# Altium PCB PCB1.PcbDoc
Units mm, origin at the board's own origin, x right, y up, seen from the top; angles counter-clockwise.
Board outline 80 x 55 mm, 2 copper layers (Top Layer, Bottom Layer); 38 components, 46 nets, 169 pads, 113 vias.
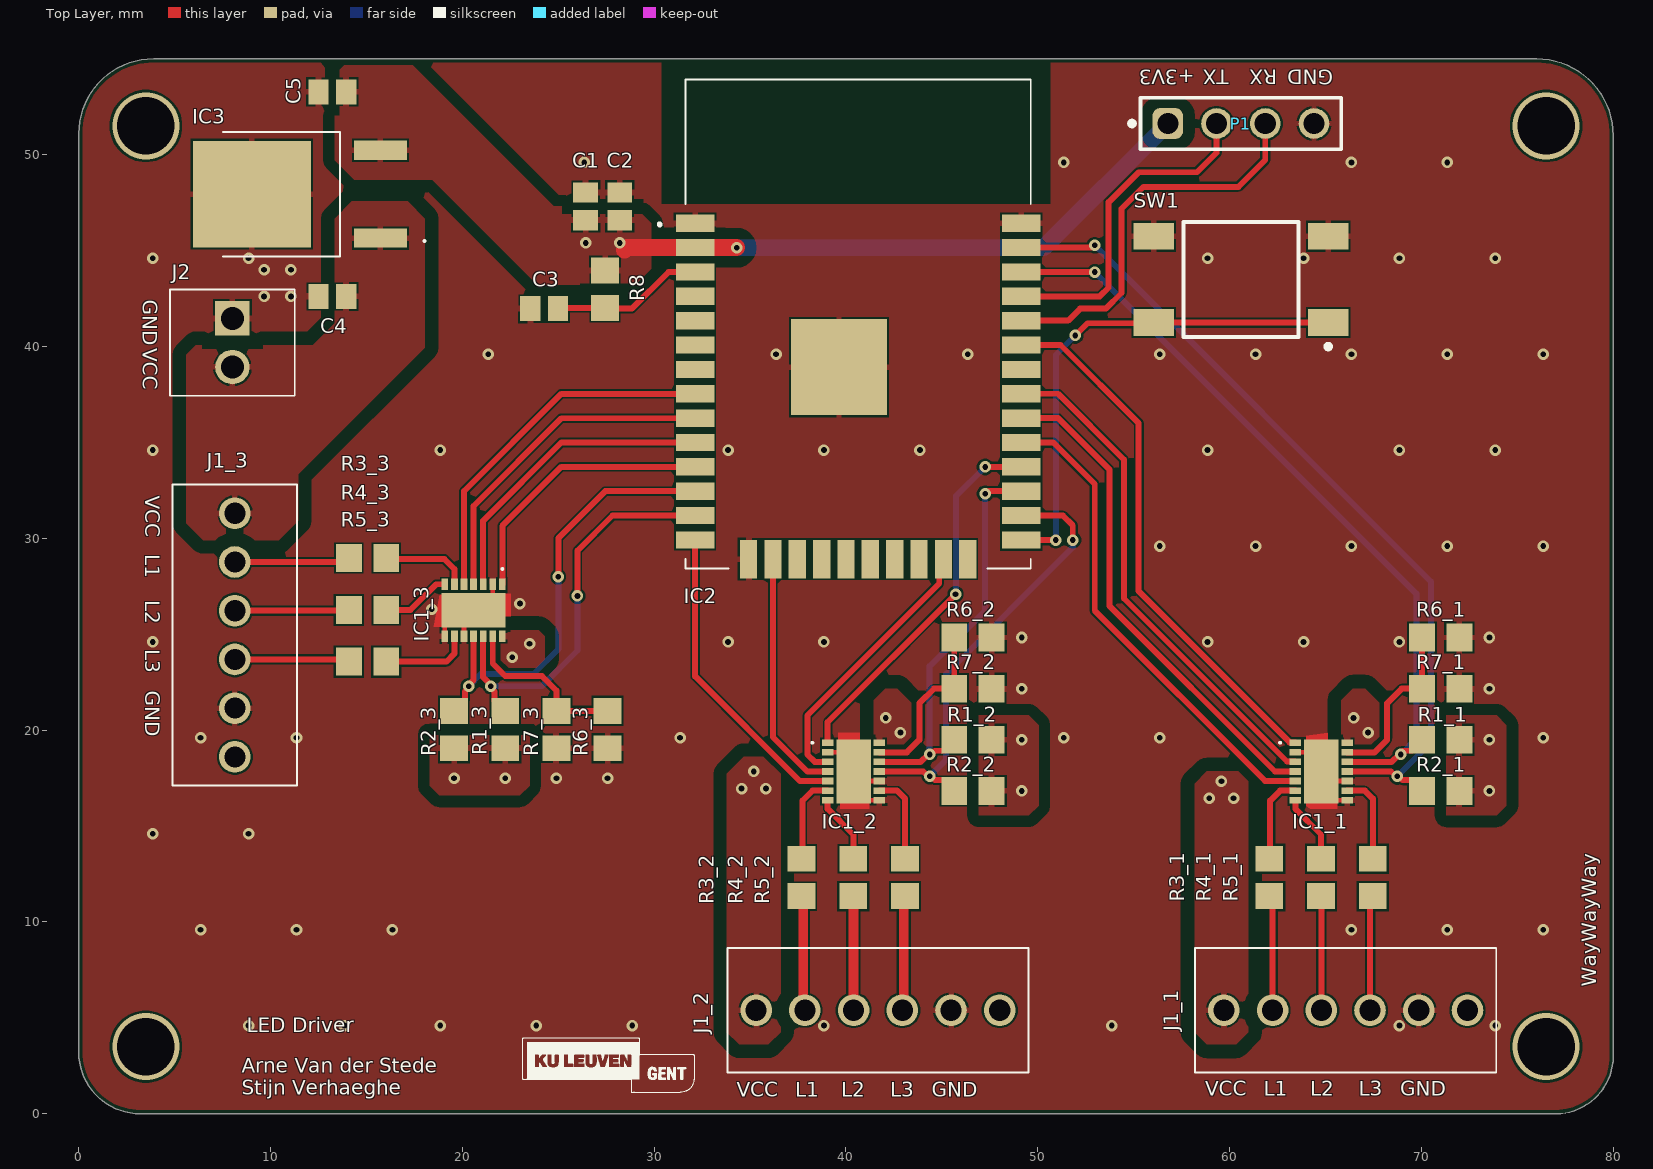
[diagram p0: Top Layer view]
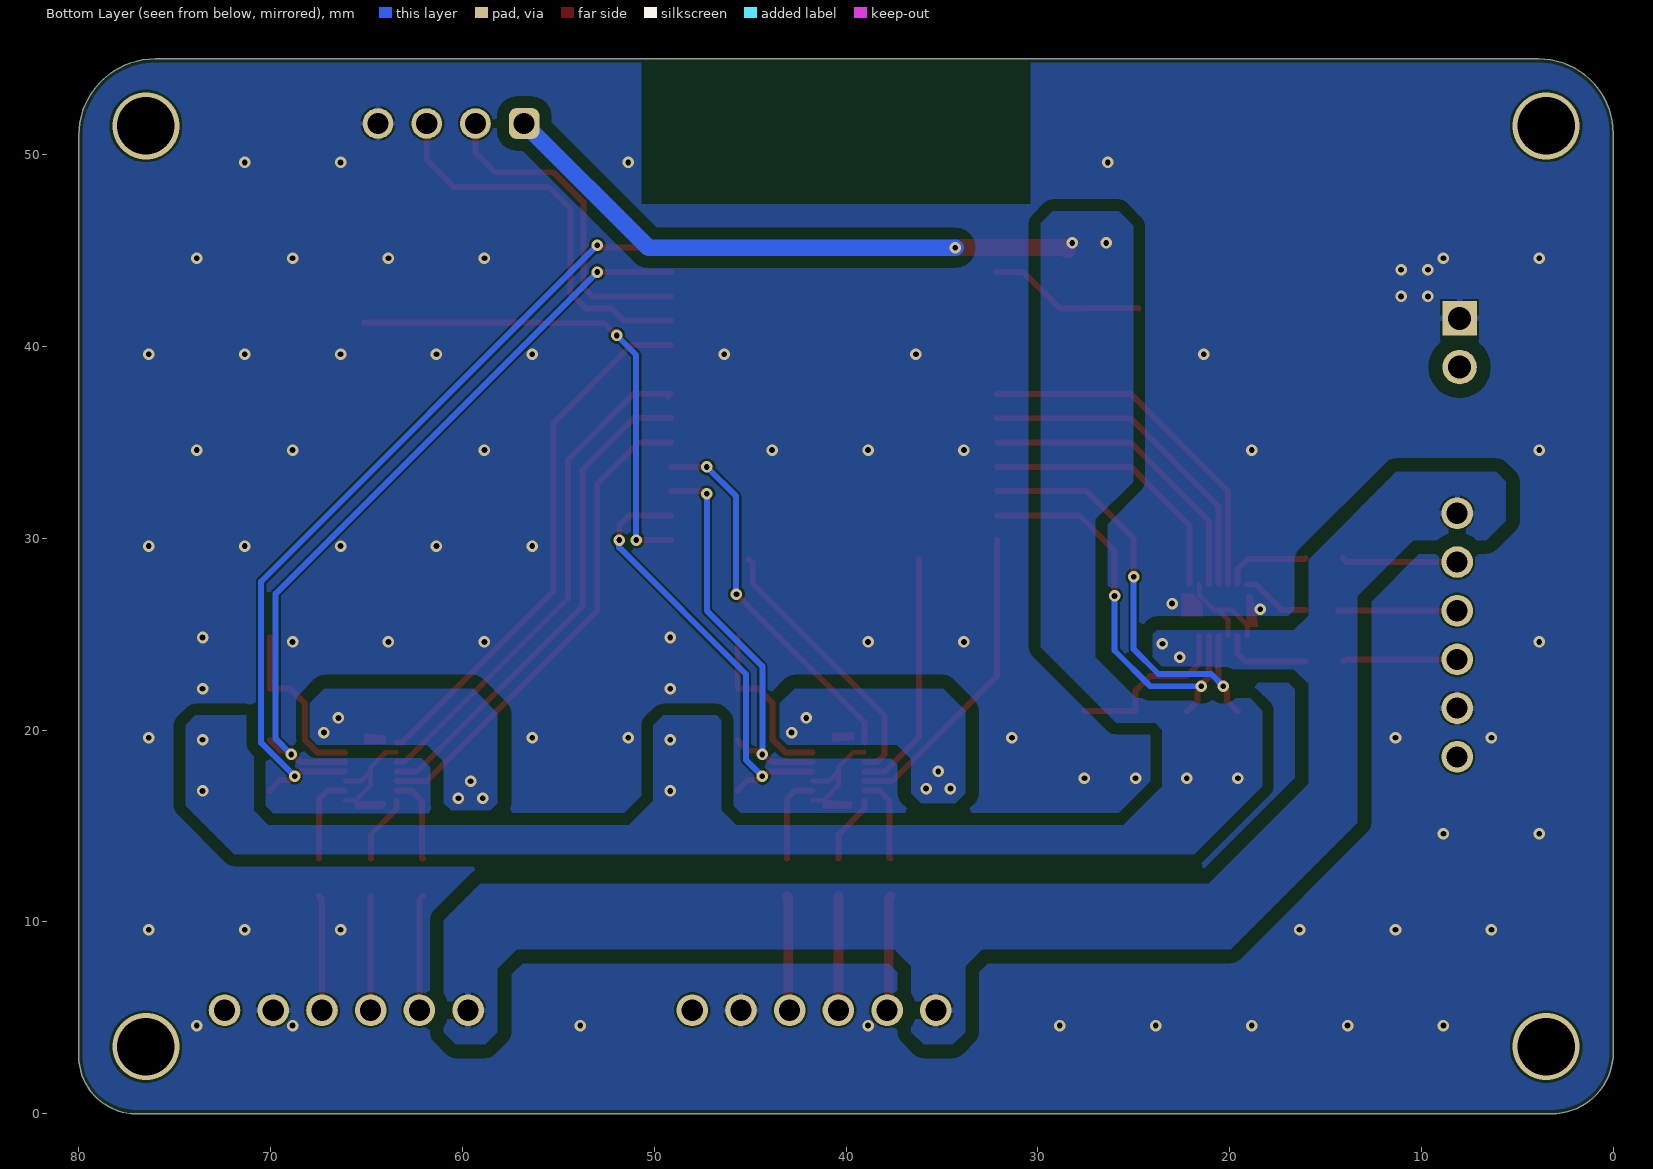
[diagram p1: Bottom Layer view, seen from below]
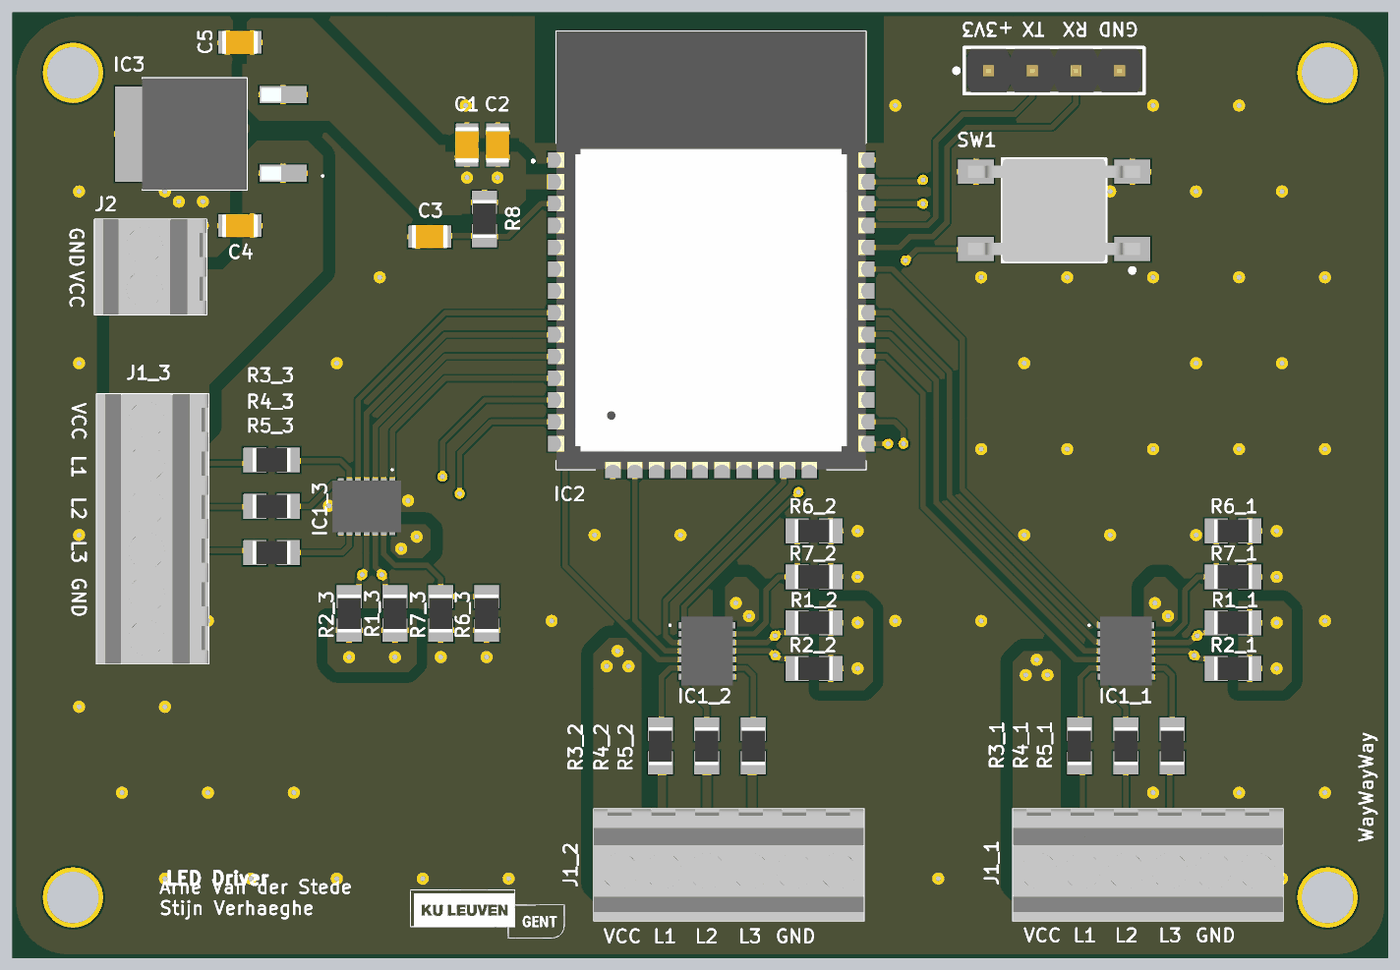
[diagram p2: 3D render of the assembled board from above, using the file's embedded part models]

## Layer stack, top to bottom
Top Solder: solder mask 0.0102, Solder Resist, Dk 3.5
Top Layer: signal copper 0.0356
Dielectric 1: dielectric 0.32, FR-4, Dk 4.8
Bottom Layer: signal copper 0.0356
Bottom Solder: solder mask 0.0102, Solder Resist, Dk 3.5

## Board outline
3.2,0 77,0 ccw(c77,3) 80,3 80,51 ccw(c76,51) 76,55 3.9,55 ccw(c3.9,51.1) 0,51.1 0,3.2 ccw(c3.2,3.2)

## Design rules (kind name [scope] priority, off if disabled: settings)
BoardOutlineClearance [All] p1: gap=0.2 ignorepadtopadclearanceinfootprint=FALSE
Clearance Clearance_2 [InNet('+3V3')] p1: gap=0.6 ignorepadtopadclearanceinfootprint=TRUE except(0.102: Arc-Arc Arc-Track Arc-SMDPad Arc-THPad Arc-Text Track-Track Track-SMDPad Track-THPad Track-Text SMDPad-SMDPad SMDPad-THPad SMDPad-Text THPad-THPad THPad-Text Fill-Text Poly-Text Region-Text Text-Text; 0.127: Arc-Via Track-Via SMDPad-Via THPad-Via Via-Via Via-Text; 0.254: Arc-Hole Track-Hole SMDPad-Hole THPad-Hole Via-Hole Fill-Hole Poly-Hole Region-Hole Text-Hole)
Clearance [InNet('VCC')] p2: gap=0.254 ignorepadtopadclearanceinfootprint=TRUE except(0.102: Arc-SMDPad Arc-THPad Arc-Text Track-SMDPad Track-THPad Track-Text SMDPad-SMDPad SMDPad-THPad SMDPad-Text THPad-THPad THPad-Text Fill-Text Poly-Text Region-Text Text-Text; 0.127: Arc-Via Track-Via SMDPad-Via THPad-Via Via-Via Via-Text; 0.71: Arc-Arc Arc-Track Track-Track THPad-Fill THPad-Poly THPad-Region Via-Fill Via-Poly Via-Region Fill-Fill Fill-Poly Fill-Region Poly-Poly Poly-Region Region-Region)
Clearance Clearance_1 [All] p3: gap=0.102 ignorepadtopadclearanceinfootprint=TRUE except(0.127: Arc-Via Track-Via SMDPad-Via THPad-Via Via-Via Via-Fill Via-Poly Via-Region Via-Text; 0.254: Arc-Hole Track-Hole SMDPad-Hole THPad-Hole Via-Hole Fill-Hole Poly-Hole Region-Hole Text-Hole)
ComponentClearance [All] p1: gap=0.102 collisioncheckmode=3 verticalgap=0.102 showdistances=TRUE
DiffPairsRouting [All] p1: maxlimit=0.102 minlimit=0.102 mostfreqgap=0.102 toplayer_minwidth=0.102 toplayer_maxwidth=1816.048 toplayer_prefwidth=0.102 bottomlayer_minwidth=0.102 bottomlayer_maxwidth=1816.048 bottomlayer_prefwidth=0.102 maxuncoupledlength=12.7
Height [All] p1: minheight=0 maxheight=1816.048 prefheight=12.7
HoleSize [All] p1: absolutevalues=TRUE maxlimit=6.3 minlimit=0.2 maxpercent=80.000 minpercent=20.000
HoleToHoleClearance [All] p1: gap=0.254 allowstackedmicrovias=FALSE
MinimumAnnularRing [All] p1: minimumring=0.152
MinimumSolderMaskSliver [All] p1: minsoldermaskwidth=0.152
PlaneClearance [All] p1: clearance=0.102
PlaneConnect PlaneConnectPowerPads [InPadClass('PowerPads')] p1: planeconnectstyle=Direct reliefexpansion=0.508 reliefentries=4 reliefconductorwidth=0.254 reliefairgap=0.254
PlaneConnect [All] p2: pad.planeconnectstyle=Relief pad.reliefexpansion=0.3 pad.reliefentries=4 pad.reliefconductorwidth=0.102 pad.reliefairgap=0.102 via.planeconnectstyle=Direct via.reliefexpansion=0.3 via.reliefentries=4 via.reliefconductorwidth=0.127 via.reliefairgap=0.127
PolygonConnect PolygonConnectPowerPads [All vs (InPadClass('PowerPads'))] p1: connectstyle=Direct reliefconductorwidth=0.254 reliefentries=4 polygonreliefangle="90 Angle" airgapwidth=0.254
PolygonConnect [All] p2: thpad.connectstyle=Relief thpad.reliefconductorwidth=0.31 thpad.reliefentries=4 thpad.polygonreliefangle="90 Angle" thpad.airgapwidth=0.102 smdpad.connectstyle=Relief smdpad.reliefconductorwidth=0.31 smdpad.reliefentries=4 smdpad.polygonreliefangle="90 Angle" smdpad.airgapwidth=0.102 via.connectstyle=Direct via.reliefconductorwidth=0.31 via.reliefentries=4 via.polygonreliefangle="90 Angle" via.airgapwidth=0.102
RoutingVias [All] p1: holewidth=0.2 width=0.45 viastyle="Through Hole" minholewidth=0.2 minwidth=0.45 maxholewidth=6.3 maxwidth=6.55
SilkToSilkClearance [All] p1: silktosilkclearance=0.127
SilkToSolderMaskClearance [IsPad] p1: minsilkscreentomaskgap=0.127 clearancetoexposedcopper=TRUE
SolderMaskExpansion [All] p1: expansion=0.051 istentingtop=FALSE
SupplyNets "Schematic Supply Nets_2" [InNet('GND')] p1: voltage=0.000
SupplyNets "Schematic Supply Nets_1" [InNet('VCC')] p2: voltage=0.000
SupplyNets "Schematic Supply Nets" [InNet('+3V3')] p3: voltage=0.000
UnRoutedNet [All] p1: checkbadconnections=TRUE
Width Power_20mil [All] p1: maxlimit=25.4 minlimit=0.254 preferedwidth=0.508 minimp=50.000000 maximp=50.000000 favimp=50.000000
Width Power_12mil [All] p2: maxlimit=25.4 minlimit=0.305 preferedwidth=0.305 minimp=50.000000 maximp=50.000000 favimp=50.000000
Width Width_10mil [All] p3: maxlimit=25.4 minlimit=0.254 preferedwidth=0.254 minimp=50.000000 maximp=50.000000 favimp=50.000000
Width Width_6mil [All] p4: maxlimit=25.4 minlimit=0.152 preferedwidth=0.152 minimp=50.000000 maximp=50.000000 favimp=50.000000
Width Width_4mil [All] p5: maxlimit=25.4 minlimit=0.102 preferedwidth=0.102 minimp=50.000000 maximp=50.000000 favimp=50.000000
19 further rules are at their usual default settings.

## Classes and differential pairs
channel class Driver: Driver1 Driver2 Driver3
component class MCU: C1 C2 C3 C4 C5 IC2 IC3 J2 P1 R8 SW1
component class Driver3: IC1_3 J1_3 R1_3 R2_3 R3_3 R4_3 R5_3 R6_3 R7_3
component class Driver2: IC1_2 J1_2 R1_2 R2_2 R3_2 R4_2 R5_2 R6_2 R7_2
component class Driver1: IC1_1 J1_1 R1_1 R2_1 R3_1 R4_1 R5_1 R6_1 R7_1

## Components (designator, comment, footprint, x,y, rotation, side; value= is the part's Value field where it differs from the comment)
C1 "Capacitor 10 µF +/-10% 50 V 0805" CAPC2013X95X50LL10T25 26.426,47.31 r90 top value=10uF
C2 "Capacitor 0.1 µF +/-10% 50 V 0805" CAPC2013X95X50LL10T25 28.204,47.31 r90 top value=0.1uF
C3 "Capacitor 100 nF +/-10% 50 V 0805" CAPC2013X95X50LL10T25 24.267,41.976 r180 top value=1uF
C4 "Capacitor 100 nF +/-10% 50 V 0805" CAPC2013X95X50LL10T25 13.218,42.611 r0 top value=0.33uF
C5 "Capacitor 100 nF +/-10% 50 V 0805" CAPC2013X95X50LL10T25 13.218,53.279 r180 top value=0.1uF
IC1_1 "AL1793AFE-13" AL1793AFE13 64.78,17.846 r270 top (schematic designator IC1)
IC1_2 "AL1793AFE-13" AL1793AFE13 40.396,17.846 r270 top (schematic designator IC1)
IC1_3 "AL1793AFE-13" AL1793AFE13 20.584,26.256 r180 top (schematic designator IC1)
IC2 "ESP-WROOM-32D" ESPWROOM32D 40.634,41.168 r0 top
IC3 "UA78M33IKVURG3" UA78M33IKVURG3 15.727,47.945 r180 top
J1_1 "282834-6" 2828346 59.7,5.4 r0 top (schematic designator J1)
J1_2 "282834-6" 2828346 35.316,5.4 r0 top (schematic designator J1)
J1_3 "282834-6" 2828346 8.138,31.308 r270 top (schematic designator J1)
J2 "282834-2" 282834-2_1 8.011,41.473 r270 top
P1 "61300411121" 61300411121 60.589,51.628 r0 top
R1_1 "Resistor 1k +/-1% 0805 125 mW" RESC2013X70X40ML20T20 71.003,19.497 r0 top value=1k (schematic designator R1)
R1_2 "Resistor 1k +/-1% 0805 125 mW" RESC2013X70X40ML20T20 46.619,19.497 r0 top value=1k (schematic designator R1)
R1_3 "Resistor 1k +/-1% 0805 125 mW" RESC2013X70X40ML20T20 22.235,20.033 r270 top value=1k (schematic designator R1)
R2_1 "Resistor 1k +/-1% 0805 125 mW" RESC2013X70X40ML20T20 71.003,16.83 r0 top value=10k (schematic designator R2)
R2_2 "Resistor 1k +/-1% 0805 125 mW" RESC2013X70X40ML20T20 46.619,16.83 r0 top value=10k (schematic designator R2)
R2_3 "Resistor 1k +/-1% 0805 125 mW" RESC2013X70X40ML20T20 19.568,20.033 r270 top value=10k (schematic designator R2)
R3_1 "Resistor 1k +/-1% 0805 125 mW" RESC2013X70X40ML20T20 62.064,12.32 r270 top value=0 (schematic designator R3)
R3_2 "Resistor 1k +/-1% 0805 125 mW" RESC2013X70X40ML20T20 37.68,12.32 r270 top value=0 (schematic designator R3)
R3_3 "Resistor 1k +/-1% 0805 125 mW" RESC2013X70X40ML20T20 15.058,28.972 r180 top value=0 (schematic designator R3)
R4_1 "Resistor 1k +/-1% 0805 125 mW" RESC2013X70X40ML20T20 64.764,12.32 r270 top value=0 (schematic designator R4)
R4_2 "Resistor 1k +/-1% 0805 125 mW" RESC2013X70X40ML20T20 40.38,12.32 r270 top value=0 (schematic designator R4)
R4_3 "Resistor 1k +/-1% 0805 125 mW" RESC2013X70X40ML20T20 15.058,26.272 r180 top value=0 (schematic designator R4)
R5_1 "Resistor 1k +/-1% 0805 125 mW" RESC2013X70X40ML20T20 67.464,12.32 r270 top value=0 (schematic designator R5)
R5_2 "Resistor 1k +/-1% 0805 125 mW" RESC2013X70X40ML20T20 43.08,12.32 r270 top value=0 (schematic designator R5)
R5_3 "Resistor 1k +/-1% 0805 125 mW" RESC2013X70X40ML20T20 15.058,23.572 r180 top value=0 (schematic designator R5)
R6_1 "Resistor 1k +/-1% 0805 125 mW" RESC2013X70X40ML20T20 71.003,24.831 r0 top value=22k (schematic designator R6)
R6_2 "Resistor 1k +/-1% 0805 125 mW" RESC2013X70X40ML20T20 46.619,24.831 r0 top value=22k (schematic designator R6)
R6_3 "Resistor 1k +/-1% 0805 125 mW" RESC2013X70X40ML20T20 27.569,20.033 r270 top value=22k (schematic designator R6)
R7_1 "Resistor 1k +/-1% 0805 125 mW" RESC2013X70X40ML20T20 71.003,22.164 r0 top value=1M (schematic designator R7)
R7_2 "Resistor 1k +/-1% 0805 125 mW" RESC2013X70X40ML20T20 46.619,22.164 r0 top value=1M (schematic designator R7)
R7_3 "Resistor 1k +/-1% 0805 125 mW" RESC2013X70X40ML20T20 24.902,20.033 r270 top value=1M (schematic designator R7)
R8 "Resistor 1k +/-1% 0805 125 mW" RESC2013X70X40ML20T20 27.442,42.992 r90 top value=10k
SW1 "FSM4JSMATR" TECO-FSM4JSMATR_V 60.589,43.5 r270 top

## Footprints (in the part's own frame and the unit in brackets; to place one, negate y for a bottom-side part, rotate by r counter-clockwise, add the part's x,y. Pads: shape width x height; smd on the part's side, far side on the other; paste and mask are expansions set on the pad)
282834-2_1 [mm]
  rect 1.8x1.8 hole 1.2: 1(0,0)
  round 1.8 hole 1.2: 2(2.54,0)
  silkscreen extent -1.5,-3.25 4.04,3.25, body extent -1.5,-3.25 4.04,3.25, height 9.87
2828346 [mm]
  round 1.65 hole 1.1: 1(0,0) 2(2.54,0) 3(5.08,0) 4(7.62,0) 5(10.16,0) 6(12.7,0)
  silkscreen extent -1.5,-3.25 14.2,3.25, body extent -1.5,-3.25 14.2,3.25, height 9.75
61300411121 [mm] "Pin Header, pitch 2.54 mm, THT, Vertical, single row, 4p"
  rrect50% 1.6x1.6 hole 1.1: 1(-3.81,0)
  round 1.6 hole 1.1: 2(-1.27,0) 3(1.27,0) 4(3.81,0)
  silkscreen extent -5.8,-1.35 5.23,1.35, body extent -5.08,-1.27 5.08,1.27, height 8.57
AL1793AFE13 [mm]
  rect 0.35x0.6 smd: 1(-1.5,-1.35) 2(-1,-1.35) 3(-0.5,-1.35) 4(0,-1.35) 5(0.5,-1.35) 6(1,-1.35) 7(1.5,-1.35) 8(1.5,1.35) 9(1,1.35) 10(0.5,1.35) 11(0,1.35) 12(-0.5,1.35) 13(-1,1.35) 14(-1.5,1.35)
  rect 3.35x1.8 smd: 15(0,0)
  silkscreen extent -1.55,-2.2 -1.45,-2.1, body extent -2,-1.5 2,1.5, height 0.75
CAPC2013X95X50LL10T25 [mm] "Chip Capacitor, 2-Leads, Body 2.10x1.35mm, IPC High Density"
  rect 1.05x1.3 smd: 1(-0.725,0) 2(0.725,0)
  body extent -1.05,-0.67 1.05,0.67, height 0.95
ESPWROOM32D [mm]
  rect 2x0.9 smd: 1(-8.5,5.26) 2(-8.5,3.99) 3(-8.5,2.72) 4(-8.5,1.45) 5(-8.5,0.18) 6(-8.5,-1.09) 7(-8.5,-2.36) 8(-8.5,-3.63) 9(-8.5,-4.9) 10(-8.5,-6.17) 11(-8.5,-7.44) 12(-8.5,-8.71) 13(-8.5,-9.98) 14(-8.5,-11.25) 25(8.5,-11.25) 26(8.5,-9.98) 27(8.5,-8.71) 28(8.5,-7.44) 29(8.5,-6.17) 30(8.5,-4.9) 31(8.5,-3.63) 32(8.5,-2.36) 33(8.5,-1.09) 34(8.5,0.18) 35(8.5,1.45) 36(8.5,2.72) 37(8.5,3.99) 38(8.5,5.26)
  rect 0.9x2 smd: 15(-5.715,-12.25) 16(-4.445,-12.25) 17(-3.175,-12.25) 18(-1.905,-12.25) 19(-0.635,-12.25) 20(0.635,-12.25) 21(1.905,-12.25) 22(3.175,-12.25) 23(4.445,-12.25) 24(5.715,-12.25)
  rect 5x5 smd: 39(-1,-2.24)
  silkscreen extent -10.4,-12.75 9,12.75, body extent -9,-12.75 9,12.75, height 3.1
RESC2013X70X40ML20T20 [mm] "Chip Resistor, 2-Leads, Body 2.2x1.35mm, IPC Low Density"
  rect 1.35x1.45 smd: 1(-0.975,0) 2(0.975,0)
  body extent -1.1,-0.67 1.1,0.67, height 0.7
TECO-FSM4JSMATR_V [mm] "SMD, 4-Leads, Body 6x6mm, Pitch 4.5mm"
  rect 1.4x2.1 smd: 1(2.25,4.55) 2(2.25,-4.55) 3(-2.25,4.55) 4(-2.25,-4.55)
  silkscreen extent -3,-3 3.62,4.68, body extent -3,-5 3,5, height 5.08
UA78M33IKVURG3 [mm]
  rect 2.75x1 smd: 1(0,2.29) 3(0,-2.29)
  rect 6.15x5.55 smd: 4(6.7,0)
  silkscreen extent -2.35,-3.25 8.2,3.25, body extent 0.1,-3.25 8.2,3.25, height 2.62

## Part data
C1: library part CMP-001-00018-6, "Chip Capacitor, 10 µF, +/- 10%, 50 V, 0805 (2012 Metric)", Capacitor Type=Ceramic, Case/Package=0805, Max Operating Temperature=125°C, Min Operating Temperature=-55°C, Tolerance=10%, Voltage Rating=50V, Mounting Technology=SM, Pins=2, RoHS Compliant=True
C2 C5: library part CMP-001-00018-6, "Chip Capacitor, 100 nF, +/- 10%, 50 V, 0805 (2012 Metric)", Capacitor Type=Ceramic, Case/Package=0805, Max Operating Temperature=125°C, Min Operating Temperature=-55°C, Tolerance=10%, Voltage Rating=50V, Mounting Technology=SM, Pins=2, RoHS Compliant=True
C3: library part CMP-001-00018-6, "Chip Capacitor, 1 µF, +/- 10%, 50 V, 0805 (2012 Metric)", Capacitor Type=Ceramic, Case/Package=0805, Max Operating Temperature=125°C, Min Operating Temperature=-55°C, Tolerance=10%, Voltage Rating=50V, Mounting Technology=SM, Pins=2, RoHS Compliant=True
C4: library part CMP-001-00018-6, "Chip Capacitor, 0.33 µF, +/- 10%, 50 V, 0805 (2012 Metric)", Capacitor Type=Ceramic, Case/Package=0805, Max Operating Temperature=125°C, Min Operating Temperature=-55°C, Tolerance=10%, Voltage Rating=50V, Mounting Technology=SM, Pins=2, RoHS Compliant=True
IC1_1 IC1_2 IC1_3: "Integrated Circuit", Manufacturer_Name="Diodes Incorporated", Mouser Part Number=621-AL1793AFE-13, Arrow Part Number=AL1793AFE-13, Arrow Price/Stock=https://www.arrow.com/en/products/al1793afe-13/diodes-incorporated?region=nac, Datasheet Link=https://www.diodes.com//assets/Datasheets/AL1791_1792_1793_1794.pdf, Height=0.65mm, Manufacturer_Part_Number=AL1793AFE-13, Mouser Price/Stock=https://www.mouser.co.uk/ProductDetail/Diodes-Incorporated/AL1793AFE-13?qs=bKenfurwlskeSg5Tj2A9LQ%3D%3D
IC2: "Integrated Circuit", Manufacturer_Name="Espressif Systems", Mouser Part Number=356-ESP-WROOM-32D, Datasheet Link=https://componentsearchengine.com/Datasheets/1/ESP-WROOM-32D.pdf, Height=3.2mm, Manufacturer_Part_Number=ESP-WROOM-32D, Mouser Price/Stock=https://www.mouser.co.uk/ProductDetail/Espressif-Systems/ESP-WROOM-32D?qs=MLItCLRbWsyWVKgdQMcFuQ%3D%3D
IC3: "Integrated Circuit", Manufacturer_Name="Texas Instruments", Mouser Part Number=595-UA78M33IKVURG3, Arrow Part Number=UA78M33IKVURG3, Arrow Price/Stock=https://www.arrow.com/en/products/ua78m33ikvurg3/texas-instruments?region=nac, Datasheet Link=http://www.ti.com/lit/gpn/ua78m, Height=2.52mm, Manufacturer_Part_Number=UA78M33IKVURG3, Mouser Price/Stock=https://www.mouser.co.uk/ProductDetail/Texas-Instruments/UA78M33IKVURG3?qs=dP8SwFlKThxMmGpfgS%2FADQ%3D%3D
J1_1 J1_2 J1_3: "Connector", Manufacturer_Name="TE Connectivity", Mouser Part Number=571-282834-6, Arrow Part Number=282834-6, Arrow Price/Stock=https://www.arrow.com/en/products/282834-6/te-connectivity?utm_currency=USD&region=nac, Datasheet Link=https://www.te.com/commerce/DocumentDelivery/DDEController?Action=srchrtrv&DocNm=1-1773458-1_EURO_STYLE_QRG&DocType=Data%20Sheet&DocLang=English&PartCntxt=282834-6&DocFormat=pdf, Height=10.3mm, Manufacturer_Part_Number=282834-6, Mouser Price/Stock=https://www.mouser.co.uk/ProductDetail/TE-Connectivity/282834-6?qs=A%252Bip%252BNCYi6M0eRGalLqPCg%3D%3D
J2: "Connector", Manufacturer_Name="TE Connectivity", Mouser Part Number=571-282834-2, Arrow Part Number=282834-2, Arrow Price/Stock=https://www.arrow.com/en/products/282834-2/te-connectivity?utm_currency=USD&region=europe, Datasheet Link=https://www.te.com/commerce/DocumentDelivery/DDEController?Action=srchrtrv&DocNm=1-1773458-1_EURO_STYLE_QRG&DocType=Data%20Sheet&DocLang=English&PartCntxt=282834-2&DocFormat=pdf, Manufacturer_Part_Number=282834-2, Mouser Price/Stock=https://www.mouser.co.uk/ProductDetail/TE-Connectivity/282834-2?qs=A%252Bip%252BNCYi6N8cVKuk8xDog%3D%3D
P1: library part CMP-1502-01064-3, Color=Black, Contact Resistance=20mΩ, Current Rating=3A, Max Operating Temperature=105°C, Min Operating Temperature=-40°C, Operating Supply Voltage=250V, Connector Type="Male Pin", Contact Material=Copper, Contact Mating Length=5.9944mm, Contact Plating=Gold, Gender=Male, Height=8.89mm, Lead Free="Lead Free", Lead Pitch=2.54mm, Mount="Through Hole", NexarPartId=32855522, Number of Contacts=4, Number of Pins=4, Number of Positions=4, Number of Rows=1, Orientation=Vertical, Packaging=Bulk, Pitch=2.54mm, REACH SVHC=Unknown, RoHS=Compliant, Termination=Solder, Voltage Rating=250V
R1_1 R1_2 R1_3: library part CMP-009-00010-5, "Chip Resistor, 1 KOhm, +/- 1%, 0.125 W, -55 to 155 degC, 0805 (2013 Metric)", Case/Package=0805, Max Operating Temperature=155°C, Min Operating Temperature=-55°C, Power=125mW, Tolerance=1%, Voltage Rating=150V, Mounting Technology=SM, Pins=2, RoHS Compliant=True
R2_1 R2_2 R2_3 R8: library part CMP-009-00010-5, "Chip Resistor, 10 KOhm, +/- 1%, 0.125 W, -55 to 155 degC, 0805 (2013 Metric)", Case/Package=0805, Max Operating Temperature=155°C, Min Operating Temperature=-55°C, Power=125mW, Tolerance=1%, Voltage Rating=150V, Mounting Technology=SM, Pins=2, RoHS Compliant=True
R3_1 R3_2 R3_3 R4_1 R4_2 R4_3 R5_1 R5_2 R5_3: library part CMP-009-00010-5, "Chip Resistor, 0 Ohm, +/- 1%, 0.125 W, -55 to 155 degC, 0805 (2013 Metric)", Case/Package=0805, Max Operating Temperature=155°C, Min Operating Temperature=-55°C, Power=125mW, Tolerance=1%, Voltage Rating=150V, Mounting Technology=SM, Pins=2, RoHS Compliant=True
R6_1 R6_2 R6_3: library part CMP-009-00010-5, "Chip Resistor, 22 KOhm, +/- 1%, 0.125 W, -55 to 155 degC, 0805 (2013 Metric)", Case/Package=0805, Max Operating Temperature=155°C, Min Operating Temperature=-55°C, Power=125mW, Tolerance=1%, Voltage Rating=150V, Mounting Technology=SM, Pins=2, RoHS Compliant=True
R7_1 R7_2 R7_3: library part CMP-009-00010-5, "Chip Resistor, 1 MOhm, +/- 1%, 0.125 W, -55 to 155 degC, 0805 (2013 Metric)", Case/Package=0805, Max Operating Temperature=155°C, Min Operating Temperature=-55°C, Power=125mW, Tolerance=1%, Voltage Rating=150V, Mounting Technology=SM, Pins=2, RoHS Compliant=True
SW1: library part CMP-2000-07486-1, "Micro Miniature Push Button Switch FSM JSM, 50 mA, -35 to 85 degC, 4-Pin SMD, RoHS, Tape and Reel", Capacitance=0f, Case\/Package=SMD/SMT, Contact Current Rating=50mA, Contact Resistance=100mOhm, Manufacturer="TE Connectivity", Max Operating Temperature=85degC, Max Voltage Rating (DC)=12V, Min Operating Temperature=-35degC, Operating Force=160gf, Package Description="4-Pin Surface Mount Device, Body 6 x 6 mm, Pitch 4.5 mm", Package Quantity=1200, Voltage Rating (DC)=24V, Actuator Length=0.055inch, Actuator Material=Polyamide, Contact Material=CopperAlloy, Contact Plating=Silver, Current Rating=50mA, Datasheet URL=http://www.te.com/commerce/DocumentDelivery/DDEController?Action=showdoc&DocId=Customer+Drawing%7F2-1437565-7%7FV%7Fpdf%7FEnglish%7FENG_CD_2-1437565-7_V.pdf%7F4-1437565-2, Datasheet Version="Rev. V, 02/2015", Electrical Life=100000Cycles, Illumination Type=Illuminated, Manufacturer URL=http://www.te.com/, Mechanical Life=100000Cycles, Mount=SurfaceMount, Mounting Technology=SurfaceMount, Orientation=Straight, Package Reference=FSM4JSMATR, Packaging=TapeandReel, REACH SVHC=Unknown, RoHSCompliant=true, Switch Travel=0.25mm, Termination=GullWing, Throw Configuration=SPST

## Via types
v1: diameter 0.6, hole 0.3, Top Layer to Bottom Layer, 109 vias
v2: diameter 3.5/3.5 (per signal layer), hole 3, Top Layer to Bottom Layer, 2 vias
v3: diameter 3.5, hole 3, Top Layer to Bottom Layer, 2 vias

## Nets (pads, with @x,y where several pads share a name; then routed paths per layer and width w, separated by ;. In a path a pad name is that pad's centre, name@x,y a point inside that pad or via, vN(x,y) a via of type N, cw(c..) or ccw(c..) an arc to the next point about the centre after c; other vN are vias at no path point)
+3V3: C1.1 C2.1 C5.1 IC2.2 IC3.3 P1.1 R1_1.2 R1_2.2 R1_3.2 R2_1.2 R2_2.2 R2_3.2 R8.2 | length 31.1
  Top Layer w0.88: 28.458,45.024 28.592,45.158 IC2.2 32.137,45.154 34.296,45.154 v1(34.3,45.151)
  Bottom Layer w0.88: v1(34.3,45.151) 50.302,45.151 P1.1
  other v1: 49.159,16.83 73.543,16.83 19.568,17.493 22.235,17.493 49.159,19.497 73.543,19.497 26.426,45.405 28.204,45.405
EN: C3.1 IC2.3 R8.1 | length 8.2
  Top Layer w0.31: C3.1@24.738,41.976 24.779,42.017 R8.1 27.483,41.976 28.839,41.976 30.751,43.888 IC2.3
GND: C1.2 C2.2 C3.2 C4.1 C5.2 IC1_1.2 IC1_1.8 IC1_1.10 IC1_1.15 IC1_2.2 IC1_2.8 IC1_2.10 IC1_2.15 IC1_3.2 IC1_3.8 IC1_3.10 IC1_3.15 IC2.1 IC2.15 IC2.38 IC2.39 IC3.4 J1_1.5 J1_2.5 J1_3.5 J2.1 P1.4 R6_1.2 R6_2.2 R6_3.2 R7_1.2 R7_2.2 R7_3.2 SW1.3 SW1.4 | length 17.6
  Top Layer w0.254: IC1_3.8 19.084,25.483 19.857,26.256 IC1_3.15 ; IC1_3.10 20.084,25.756 IC1_3.15 ; IC1_3.2 21.584,27.029 20.811,26.256 IC1_3.15 ; IC1_2.2 39.623,18.846 40.396,18.073 IC1_2.15 ; IC1_2.8 41.169,16.346 40.396,17.119 IC1_2.15 ; IC1_2.10 40.896,17.346 IC1_2.15 ; IC1_1.2 64.007,18.846 64.78,18.073 IC1_1.15 ; IC1_1.8 65.553,16.346 64.78,17.119 IC1_1.15 ; IC1_1.10 65.28,17.346 IC1_1.15
  other v1: 8.852,4.6 13.852,4.6 18.852,4.6 23.852,4.6 28.852,4.6 38.852,4.6 53.852,4.6 68.852,4.6 73.852,4.6 6.352,9.6 11.352,9.6 16.352,9.6 66.352,9.6 71.352,9.6 76.352,9.6 3.852,14.6 8.852,14.6 24.902,17.493 27.569,17.493 6.352,19.6 11.352,19.6 31.352,19.6 51.352,19.6 56.352,19.6 76.352,19.6 49.159,22.164 73.543,22.164 3.852,24.6 33.852,24.6 38.852,24.6 58.852,24.6 63.852,24.6 68.852,24.6 49.159,24.831 73.543,24.831 18.4,26.3 23,26.6 56.352,29.6 61.352,29.6 66.352,29.6 71.352,29.6 76.352,29.6 3.852,34.6 18.852,34.6 33.852,34.6 38.852,34.6 43.852,34.6 58.852,34.6 68.852,34.6 73.852,34.6 21.352,39.6 36.352,39.6 46.352,39.6 56.352,39.6 61.352,39.6 66.352,39.6 71.352,39.6 76.352,39.6 9.662,42.611 11.059,42.611 9.662,44.008 11.059,44.008 3.852,44.6 8.852,44.6 58.852,44.6 63.852,44.6 68.852,44.6 73.852,44.6 26.352,49.6 51.352,49.6 66.352,49.6 71.352,49.6
IO0: IC2.25 SW1.1 SW1.2 | length 26.4
  Top Layer w0.31: IC2.25 49.137,29.914 50.933,29.914 v1(50.937,29.911) ; v1(51.953,40.579) 52.588,41.214 56.003,41.214 SW1.2 SW1.1
  Bottom Layer w0.31: v1(50.937,29.911) 50.937,39.563 v1(51.953,40.579)
LED1_1: J1_1.2 R3_1.2 | length 6
  Top Layer w0.31: R3_1.2 62.24,11.169 J1_1.2
LED1_2: J1_2.2 R3_2.2 | length 6
  Top Layer w0.508: R3_2.2 37.768,11.257 37.768,5.488 J1_2.2
LED1_3: J1_3.2 R3_3.2 | length 6
  Top Layer w0.31: J1_3.2 13.879,28.768 R3_3.2
LED2_1: J1_1.3 R4_1.2 | length 6
  Top Layer w0.31: R4_1.2 64.78,11.329 J1_1.3
LED2_2: J1_2.3 R4_2.2 | length 6
  Top Layer w0.508: J1_2.3 40.388,5.408 40.388,11.337 R4_2.2 R4_2.2@40.396,11.345
LED2_3: J1_3.3 R4_3.2 | length 6.2
  Top Layer w0.31: J1_3.3 R4_3.2@14.361,26.228
LED3_1: J1_1.4 R5_1.2 | length 6
  Top Layer w0.31: J1_1.4 67.32,11.201 R5_1.2
LED3_2: J1_2.4 R5_2.2 | length 6
  Top Layer w0.508: J1_2.4 43.008,5.472 43.008,11.273 R5_2.2
LED3_3: J1_3.4 R5_3.2 | length 6
  Top Layer w0.31: J1_3.4 13.967,23.688 R5_3.2
NetIC1_1_1: IC1_1.1 IC2.33 | length 28
  Top Layer w0.31: IC2.33 51.184,40.078 55.255,36.007 55.255,27.244 63.133,19.366 63.41,19.366 IC1_1.1
NetIC1_1_3: IC1_1.3 IC2.31 | length 26.7
  Top Layer w0.31: IC2.31@49.268,37.404 IC2.31 49.268,37.538 51.057,37.538 54.493,34.102 54.493,26.863 62.99,18.366 63.41,18.366 IC1_1.3
NetIC1_1_4: IC1_1.4 IC2.30 | length 26.1
  Top Layer w0.31: IC2.30 51.057,36.268 53.731,33.594 53.731,26.482 62.367,17.846 IC1_1.4
NetIC1_1_5: IC1_1.5 IC2.29 | length 25.5
  Top Layer w0.31: IC2.29 50.803,34.998 52.969,32.832 52.969,26.228 61.851,17.346 IC1_1.5
NetIC1_1_6: IC1_1.6 R3_1.1 | length 4.6
  Top Layer w0.31: R3_1.1 62.113,13.344 62.113,16.322 62.637,16.846 IC1_1.6
NetIC1_1_7: IC1_1.7 R4_1.1 | length 3.6
  Top Layer w0.31: IC1_1.7 63.43,15.894 64.764,14.56 R4_1.1
NetIC1_1_9: IC1_1.9 R5_1.1 | length 4.6
  Top Layer w0.31: IC1_1.9 67.05,16.846 67.464,16.432 R5_1.1
NetIC1_1_11: IC1_1.11 IC2.37 R2_1.1 | length 43.9
  Top Layer w0.31: IC2.37 49.137,45.154 52.767,45.154 52.891,45.278 v1(52.969,45.278) ; IC1_1.11 68.413,17.846 68.667,17.592 v1(68.745,17.592) 68.823,17.592 69.015,17.4 69.508,17.4 70.028,16.88 R2_1.1
  Bottom Layer w0.31: v1(52.969,45.278) 70.495,27.752 70.495,19.342 v1(68.745,17.592)
NetIC1_1_12: IC1_1.12 IC2.36 R1_1.1 | length 40.8
  Top Layer w0.31: IC2.36 49.137,43.884 52.965,43.884 v1(52.969,43.881) ; IC1_1.12 68.451,18.346 68.84,18.735 v1(68.918,18.735) ; v1@68.823,18.735 69.015,18.927 69.508,18.927 70.028,19.447 R1_1.1
  Bottom Layer w0.31: v1(52.969,43.881) 69.733,27.117 69.733,19.55 v1(68.918,18.735)
NetIC1_1_13: IC1_1.13 R6_1.1 R7_1.1 | length 9.1
  Top Layer w0.31: IC1_1.13 67.558,18.846 68.209,19.497 68.209,21.402 68.971,22.164 R7_1.1 R6_1.1
NetIC1_2_1: IC1_2.1 IC2.28 | length 19.7
  Top Layer w0.31: IC1_2.1 39.046,20.425 v1(45.713,27.092) ; v1(47.254,33.721) 47.257,33.724 49.13,33.724 IC2.28
  Bottom Layer w0.31: v1(45.713,27.092) 45.73,27.109 45.73,32.197 v1(47.254,33.721)
NetIC1_2_3: IC1_2.3 IC2.23 | length 14.3
  Top Layer w0.31: IC1_2.3 38.372,18.346 37.983,18.735 37.983,20.767 44.863,27.647 44.863,28.702 IC2.23
NetIC1_2_4: IC1_2.4 IC2.16 | length 12.9
  Top Layer w0.31: IC2.16 36.189,19.64 37.983,17.846 IC1_2.4
NetIC1_2_5: IC1_2.5 IC2.14 | length 16.3
  Top Layer w0.31: IC2.14 32.134,22.806 37.594,17.346 IC1_2.5
NetIC1_2_6: IC1_2.6 R3_2.1 | length 4.6
  Top Layer w0.31: R3_2.1 37.729,13.344 37.729,16.322 38.253,16.846 IC1_2.6
NetIC1_2_7: IC1_2.7 R4_2.1 | length 3.6
  Top Layer w0.31: IC1_2.7 39.046,15.894 40.38,14.56 R4_2.1
NetIC1_2_9: IC1_2.9 R5_2.1 | length 4.6
  Top Layer w0.31: IC1_2.9 42.666,16.846 43.08,16.432 R5_2.1
NetIC1_2_11: IC1_2.11 IC2.26 R2_2.1 | length 23.4
  Top Layer w0.31: IC1_2.11 44.029,17.846 44.283,17.592 v1(44.361,17.592) 44.439,17.592 44.631,17.4 45.124,17.4 45.644,16.88 R2_2.1 ; IC2.26 49.137,31.184 51.314,31.184 51.823,30.676 51.823,29.914 v1(51.826,29.911)
  Bottom Layer w0.31: v1(44.361,17.592) 45.222,18.453 45.222,22.926 51.826,29.53 v1(51.826,29.911)
NetIC1_2_12: IC1_2.12 IC2.27 R1_2.1 | length 21.1
  Top Layer w0.31: IC1_2.12 43.894,18.346 44.283,18.735 v1(44.361,18.735) 44.439,18.735 44.631,18.927 45.124,18.927 45.644,19.447 R1_2.1 ; v1(47.254,32.324) 47.332,32.324 47.466,32.458 IC2.27
  Bottom Layer w0.31: v1(44.361,18.735) 44.361,23.335 47.254,26.228 v1(47.254,32.324)
NetIC1_2_13: IC1_2.13 R6_2.1 R7_2.1 | length 9.1
  Top Layer w0.31: IC1_2.13 43.174,18.846 43.825,19.497 43.825,21.402 44.587,22.164 R7_2.1 R6_2.1
NetIC1_3_1: IC1_3.1 IC2.11 | length 14.4
  Top Layer w0.31: IC1_3.1 22.084,30.649 25.163,33.728 IC2.11
NetIC1_3_3: IC1_3.3 IC2.10 | length 16.1
  Top Layer w0.31: IC1_3.3 21.084,30.919 25.163,34.998 IC2.10
NetIC1_3_4: IC1_3.4 IC2.9 | length 17.5
  Top Layer w0.31: IC1_3.4 20.584,31.689 25.156,36.261 32.127,36.261 IC2.9
NetIC1_3_5: IC1_3.5 IC2.8 | length 19
  Top Layer w0.31: IC1_3.5 20.084,32.459 25.156,37.531 32.127,37.531 IC2.8
NetIC1_3_6: IC1_3.6 R3_3.1 | length 4.6
  Top Layer w0.31: R3_3.1 16.082,28.923 19.06,28.923 19.584,28.399 IC1_3.6
NetIC1_3_7: IC1_3.7 R4_3.1 | length 3.6
  Top Layer w0.31: R4_3.1 17.298,26.272 18.632,27.606 IC1_3.7
NetIC1_3_9: IC1_3.9 R5_3.1 | length 4.6
  Top Layer w0.31: R5_3.1 19.17,23.572 19.584,23.986 IC1_3.9
NetIC1_3_11: IC1_3.11 IC2.12 R2_3.1 | length 23.8
  Top Layer w0.31: R2_3.1 19.618,21.008 20.138,21.528 20.138,22.021 20.33,22.213 v1(20.33,22.291) 20.33,22.369 20.584,22.623 IC1_3.11 ; v1(25,28) 25,30.009 27.449,32.458 IC2.12
  Bottom Layer w0.31: v1(20.33,22.291) 20.965,22.926 23.704,22.926 25,24.222 v1(25,28)
NetIC1_3_12: IC1_3.12 IC2.13 R1_3.1 | length 21.8
  Top Layer w0.31: IC1_3.12 21.084,22.758 21.473,22.369 v1(21.473,22.291) 21.473,22.213 21.665,22.021 21.665,21.528 22.185,21.008 R1_3.1 ; v1(26,27) 26,29.358 27.83,31.188 IC2.13
  Bottom Layer w0.31: v1(21.473,22.291) 24.14,22.291 26,24.151 v1(26,27)
NetIC1_3_13: IC1_3.13 R6_3.1 R7_3.1 | length 9.1
  Top Layer w0.31: IC1_3.13 21.584,23.478 22.235,22.827 24.14,22.827 24.902,22.065 R7_3.1 R6_3.1
RX: IC2.34 P1.3 | length 20.7
  Top Layer w0.31: IC2.34 51.579,41.348 52.207,41.976 53.549,41.976 54.366,42.793 54.366,47.183 55.509,48.326 60.462,48.326 61.859,49.723 P1.3
TX: IC2.35 P1.2 | length 17.4
  Top Layer w0.31: IC2.35 53.23,42.618 53.692,43.08 53.692,47.525 55.255,49.088 58.303,49.088 59.319,50.104 P1.2
VCC: C4.2 IC1_1.14 IC1_2.14 IC1_3.14 IC3.1 J1_1.1 J1_2.1 J1_3.1 J2.2
  other v1: 58.938,16.449 60.208,16.449 34.554,16.957 35.824,16.957 59.573,17.338 35.189,17.846 42.837,19.878 67.221,19.878 42.075,20.64 66.459,20.64 22.6,23.8 23.5,24.5
pads on no net: IC2.4 IC2.5 IC2.6 IC2.7 IC2.17 IC2.18 IC2.19 IC2.20 IC2.21 IC2.22 IC2.24 IC2.32 J1_1.6 J1_2.6 J1_3.6
copper on no net:
  other v2: 3.5,3.5 3.5,51.5
  other v3: 76.5,3.5 76.5,51.5

## Polygon pours and split planes (outlines as drawn)
VCC on Top Layer "VCC_L01_P041" (solid, pour order 41): 60.97,17.338 60.462,17.846 58.811,17.846 58.176,17.211 58.176,4.257 58.811,3.622 60.335,3.622 60.97,4.257
VCC on Top Layer "Top Layer-VCC" (solid, pour order 14): 18.044,39.944 18.044,46.675 17.155,47.564 14.234,47.564 13.345,46.675 13.345,41.214 12.202,40.071 6.106,40.071 5.598,39.563 5.598,30.8 6.487,29.911 10.424,29.911 11.44,30.927 11.44,33.34
+3V3 on Top Layer "+3V3_L01_P006" (solid, pour order 6): 46.492,20.481 46.492,15.814 46.746,15.56 49.54,15.56 50.048,16.068 50.048,20.259 49.54,20.767 46.721,20.767
+3V3 on Top Layer "+3V3_L01_P009" (solid, pour order 9): 70.876,20.481 70.876,15.814 71.13,15.56 73.924,15.56 74.432,16.068 74.432,20.259 73.924,20.767 71.105,20.767
+3V3 on Top Layer "+3V3_L01_P010" (solid, pour order 10): 23.219,20.16 18.552,20.16 18.298,19.906 18.298,17.112 18.806,16.604 22.997,16.604 23.505,17.112 23.505,19.931
+3V3 on Top Layer "+3V3_L01_P012" (solid, pour order 12): 13.345,54.168 13.853,54.676 17.409,54.676 24.775,47.31 28.966,47.31 29.855,46.421 29.855,43.754 28.966,42.865 24.267,42.865 18.425,48.707 14.361,48.707 13.345,49.723
VCC on Top Layer "VCC_L01_P018" (solid, pour order 18): 21.981,25.212 21.8,25.031 21.8,23.742 22.362,23.18 23.78,23.18 24.3,23.7 24.3,24.9 23.988,25.212
VCC on Top Layer "VCC_L01_P023" (solid, pour order 23): 41.44,19.243 41.567,19.116 42.964,19.116 43.472,19.624 43.472,21.374 42.682,22.164 42.047,22.164 41.44,21.557
VCC on Top Layer "VCC_L01_P025" (solid, pour order 25): 65.824,19.243 65.951,19.116 67.348,19.116 67.856,19.624 67.856,21.374 67.066,22.164 66.431,22.164 65.824,21.557
VCC on Top Layer "VCC_L01_P032" (solid, pour order 32): 36.586,4.257 35.951,3.622 34.427,3.622 33.792,4.257 33.792,17.719 34.681,18.608 35.697,18.608 36.586,17.719 36.586,10.099
GND on Top Layer "GND_L01_P046" (solid, pour order 46): 46.492,25.815 46.492,21.148 46.746,20.894 49.54,20.894 50.048,21.402 50.048,25.593 49.54,26.101 46.721,26.101
GND on Top Layer "GND_L01_P054" (solid, pour order 54): 28.553,20.16 23.886,20.16 23.632,19.906 23.632,17.112 24.14,16.604 28.331,16.604 28.839,17.112 28.839,19.931
GND on Top Layer "GND_L01_P060" (solid, pour order 60): 70.876,25.815 70.876,21.148 71.13,20.894 73.924,20.894 74.432,21.402 74.432,25.593 73.924,26.101 71.105,26.101
GND on Top Layer "GND_L01_P062" (solid, pour order 62): 0,55 0,0 80,0 80,55
+3V3 on Bottom Layer "Bottom Layer-+3V3" (solid, pour order 35): 25.029,32.959 27,30.988 27,23.8 24.856,21.656 18.933,21.656 18.298,21.021 18.298,17.084 21.854,13.528 71.892,13.528 74.432,16.068 74.432,20.259 73.924,20.767 71.13,20.767 70.876,20.513 70.876,15.814 70.114,15.052 51.318,15.052 50.048,16.322 50.048,20.259 49.54,20.767 46.746,20.767 46.492,20.513 46.492,15.814 45.73,15.052 25.537,15.052 23.505,17.084 23.505,20.005 23.886,20.386 25.918,20.386 29.855,24.323 29.855,46.421 29.22,47.056 25.791,47.056 25.029,46.294
VCC on Bottom Layer "Bottom Layer-VCC" (solid, pour order 58): 33.792,7.686 33.792,4.257 34.427,3.622 35.951,3.622 36.586,4.257 36.586,7.686 37.475,8.575 57.16,8.575 58.176,7.559 58.176,4.257 58.811,3.622 60.335,3.622 60.97,4.257 60.97,10.099 59.065,12.004 21.092,12.004 15.885,17.211 15.885,22.418 16.647,23.18 23.378,23.18 24,23.802 24,25 23.788,25.212 16.647,25.212 15.885,25.974 15.885,28.895 11.313,33.467 6.106,33.467 5.598,32.959 5.598,30.927 6.614,29.911 10.424,29.911 13.345,26.99 13.345,15.179 19.949,8.575 32.903,8.575
VCC on Bottom Layer "VCC_L02_P053" (solid, pour order 53): 43.063,19.243 43.444,19.624 43.444,21.402 42.682,22.164 34.935,22.164 33.792,21.021 33.792,16.703 34.3,16.195 36.078,16.195 36.586,16.703 36.586,18.481 37.348,19.243
VCC on Bottom Layer "VCC_L02_P059" (solid, pour order 59): 67.574,19.243 67.955,19.624 67.955,21.402 67.193,22.164 59.446,22.164 58.176,20.894 58.176,16.195 58.557,15.814 60.589,15.814 60.97,16.195 60.97,18.354 61.859,19.243
GND on Bottom Layer "GND_L02_P063" (solid, pour order 63): 0,55 0,0 80,0 80,55

## Other copper
Top Layer:
  region net GND: 18.807,27.052 19.1,27.052 19.1,25.4 18.5,25.4
  region net GND: 21.9,27.1 22.513,27.1 22.513,25.928 21.4,25.928 21.4,26.6
  region net GND: 39.6,19.5 39.6,19.877 40.724,19.877 40.724,19.4 40.6,19.4
  region net GND: 64,19.7 64,19.3 65.108,19.3 65.108,19.877
  region net GND: 63.984,16.069 63.984,16.3 65.6,16.3 65.6,15.9 64.2,15.9
  pour cut-out: 30.363,55.108 30.363,47.408 50.683,47.408 50.683,55.108
  region net GND: 39.7,16.3 39.7,15.9 41.2,15.9 41.2,16.346 41.169,16.346
Bottom Layer:
  pour cut-out: 30.363,55.108 30.363,47.408 50.683,47.408 50.683,55.108

## Silkscreen, mask and mechanical layers (free items; w line width, h text height)
Top Overlay:
  drawing of 5 lines, arcs and shapes, not listed
  text "+3V3" at 58.176,54.422 h0.76 r180
  text "TX" at 59.954,54.422 h0.76 r180
  text "RX" at 62.494,54.422 h0.76 r180
  text "GND" at 65.415,54.422 h0.76 r180
  text "GND" at 3.344,42.438 h0.76 r270
  text "VCC" at 3.344,39.898 h0.76 r270
  text "VCC" at 3.471,32.222 h0.76 r270
  text "L1" at 3.471,29.175 h0.76 r270
  text "L2" at 3.471,26.762 h0.76 r270
  text "L3" at 3.471,24.222 h0.76 r270
  text "GND" at 3.471,22.062 h0.76 r270
  text "WayWayWay" at 79.119,6.627 h0.76 r90
  text "LED Driver" at 8.754,4.254 h0.76
  text "Arne Van der Stede / Stijn Verhaeghe" at 8.5,1 h0.76
  text "VCC" at 58.735,0.933 h0.76
  text "L1" at 61.783,0.933 h0.76
  text "L2" at 64.196,0.933 h0.76
  text "L3" at 66.736,0.933 h0.76
  text "GND" at 68.895,0.933 h0.76
  text "VCC" at 34.3,0.882 h0.76
  text "L1" at 37.348,0.882 h0.76
  text "L2" at 39.761,0.882 h0.76
  text "L3" at 42.301,0.882 h0.76
  text "GND" at 44.46,0.882 h0.76